# Altium PCB lab2_ignatova_buck_boost.PcbDoc
Units mm, origin at the board's own origin, x right, y up, seen from the top; angles counter-clockwise.
Board outline 45.5 x 25.8 mm, 2 copper layers (Top Layer, Bottom Layer), stack 1.57 mm thick; 22 components, 15 nets, 69 pads, 94 vias.
Unrouted connection lines stored in the file: 98.
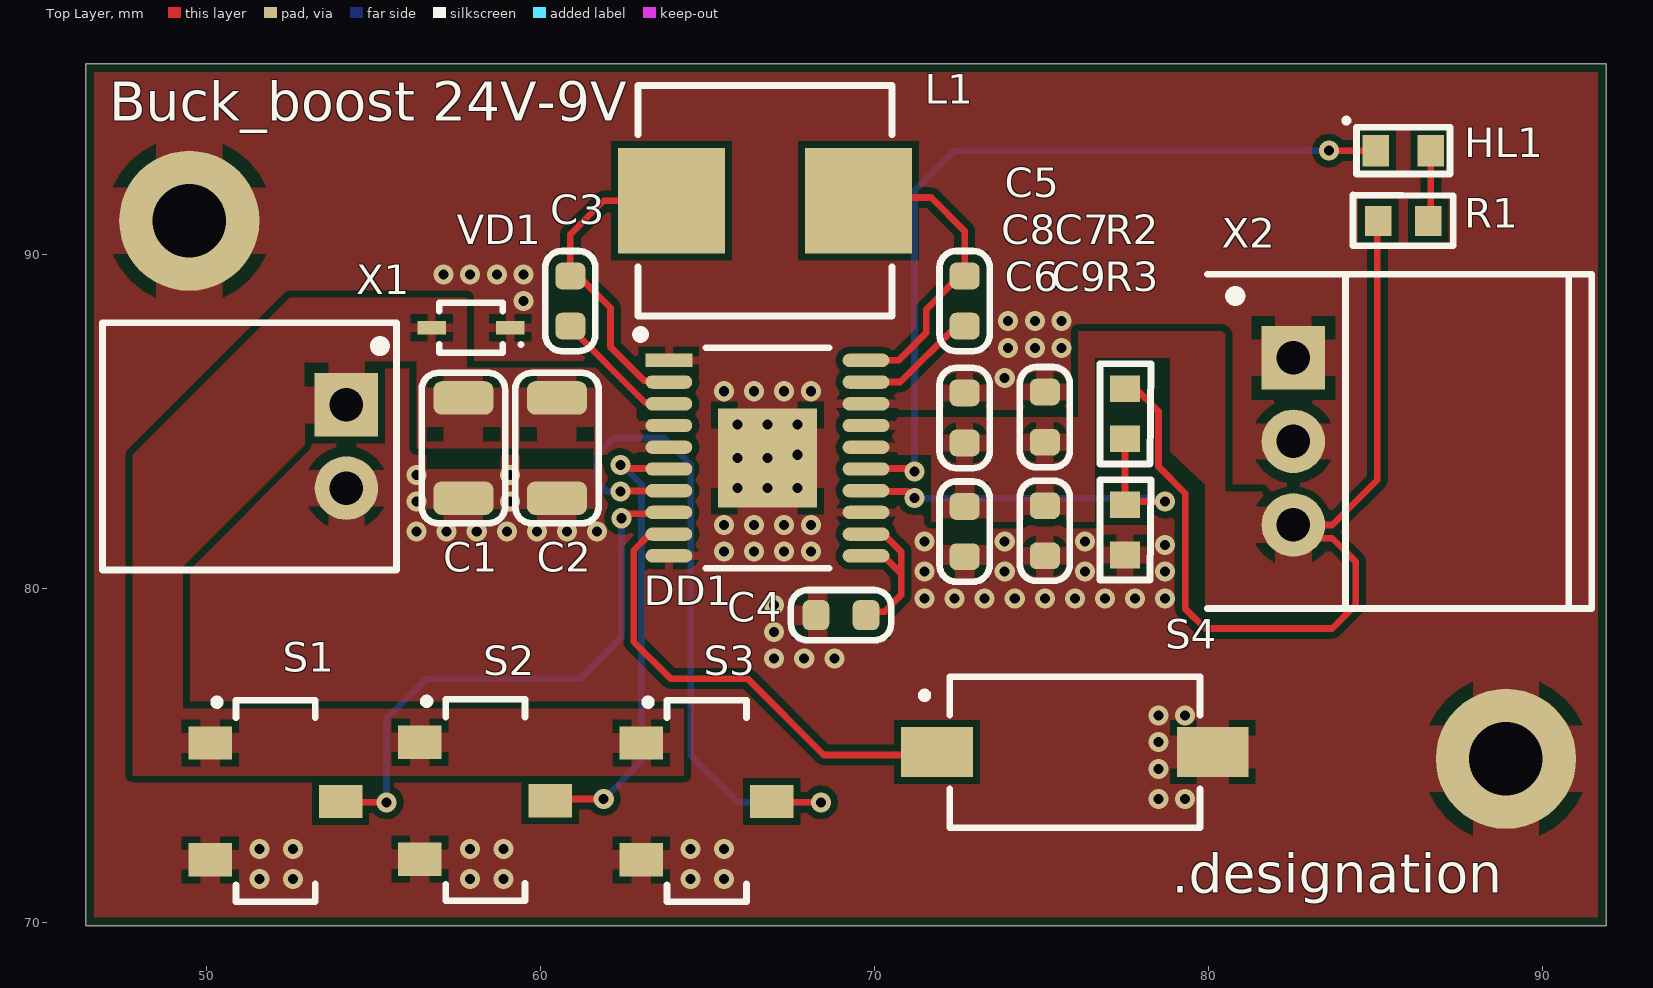
[diagram p0: Top Layer view]
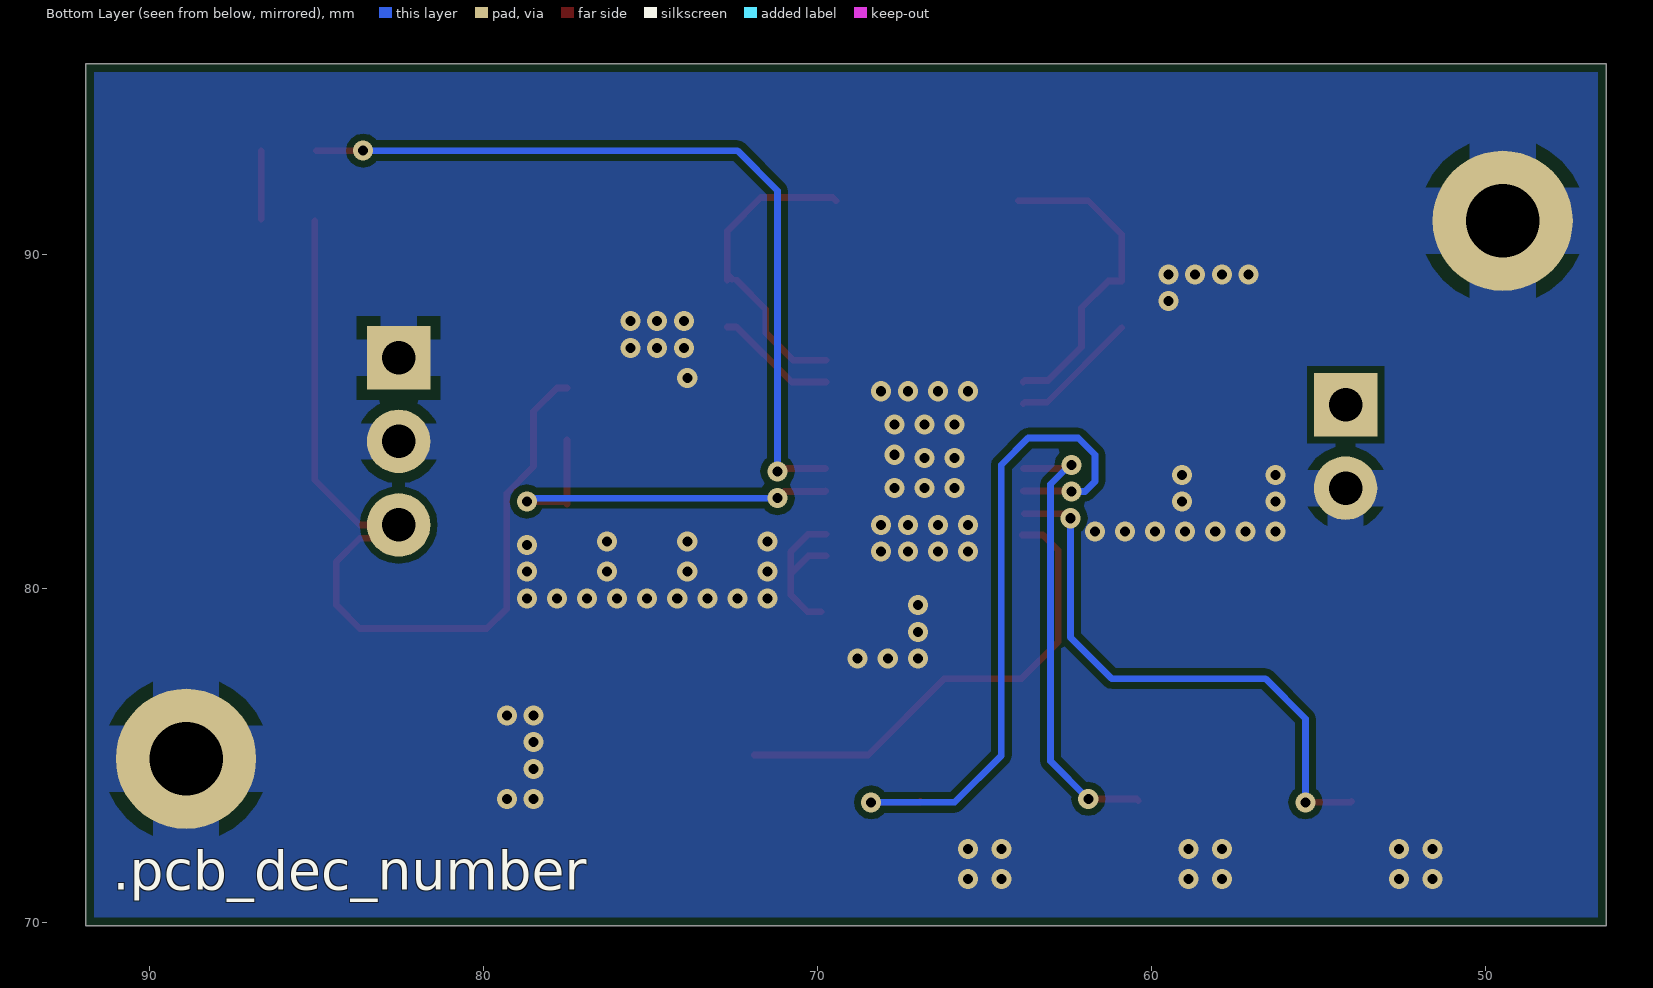
[diagram p1: Bottom Layer view, seen from below]
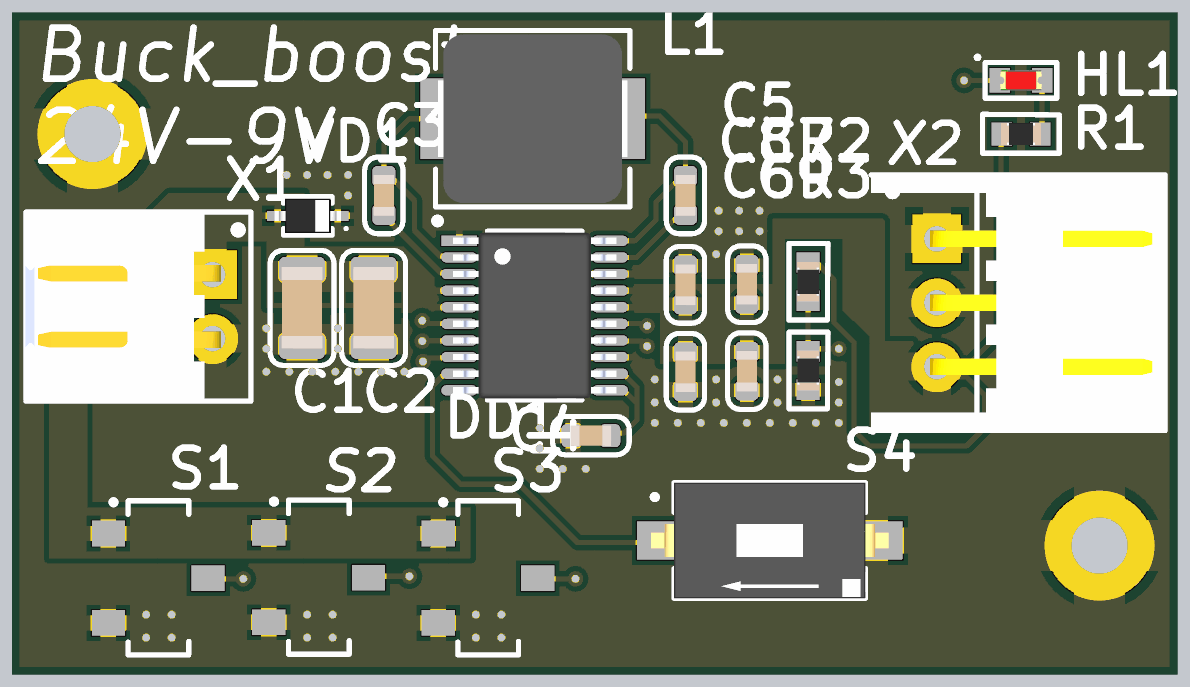
[diagram p2: 3D render of the assembled board from above, using the file's embedded part models]

## Layer stack, top to bottom
Top Solder: solder mask 0.0102, Solder Resist, Dk 3.5
Top Layer: signal copper 0.035
Core 1: core 1.5, FR4, Dk 4.6
Bottom Layer: signal copper 0.035
Bottom Solder: solder mask 0.0102, Solder Resist, Dk 3.5

## Board outline
46.4,69.9 91.9,69.9 91.9,95.7 46.4,95.7

## Design rules (kind name [scope] priority, off if disabled: settings)
AcuteAngle min_acute_angle [OnCopper] p1: minimum=3.50000000000000E+0001 checktracksonly=FALSE // Минимальный угол между примитивами топологии
BoardOutlineClearance board_outline_clearance_std [NOT (OnLayer('Bottom Overlay') OR OnLayer('Top Overlay'))] p1: gap=0.25 ignorepadtopadclearanceinfootprint=FALSE except(0: Arc-SplitContinuation Track-SplitContinuation SMDPad-SplitContinuation THPad-SplitContinuation Via-SplitContinuation Fill-SplitContinuation Poly-SplitContinuation Region-SplitContinuation Text-SplitContinuation) // Отступ элементов топологии от края фрезеруемой печатной платы
Clearance clearance_outer_35um_std [OnTopLayer OR OnBottomLayer] p1: gap=0.2 ignorepadtopadclearanceinfootprint=TRUE except(0.25: Arc-Hole Track-Hole SMDPad-Hole THPad-Hole Via-Hole Fill-Hole Poly-Hole Region-Hole Text-Hole) // Зазоры на внешних слоях
Clearance clearance_inner_35um_std [NOT (OnTopLayer Or OnBottomLayer)] p2: gap=0.2 ignorepadtopadclearanceinfootprint=FALSE except(0.25: Arc-Hole Track-Hole SMDPad-Hole THPad-Hole Via-Hole Fill-Hole Poly-Hole Region-Hole Text-Hole) // Зазоры на внутренних слоях
ComponentClearance [All] p1: gap=0 collisioncheckmode=3 verticalgap=0 showdistances=FALSE
DiffPairsRouting diff_pairs_routing [All] p1: maxlimit=0.127 minlimit=0.127 mostfreqgap=0.127 toplayer_minwidth=0.143 toplayer_maxwidth=0.143 toplayer_prefwidth=0.143 bottomlayer_minwidth=0.143 bottomlayer_maxwidth=0.143 bottomlayer_prefwidth=0.143 impedanceprofiledriven=TRUE impedanceprofileid={FD46899E-B5A2-4EF5-A302-5D2DB6A51F35} maxuncoupledlength=12.7 // Правила трассировки дифференциальных пар
HoleSize min_hole_size_std [IsPad] p1: absolutevalues=TRUE maxlimit=5.9 minlimit=0.6 maxpercent=80.000 minpercent=20.000 // Диаметр межслойного переходного отверстия
HoleSize min_hole_size_via_std [IsVia] p2: absolutevalues=TRUE maxlimit=5.9 minlimit=0.3 maxpercent=80.000 minpercent=20.000 // Минимальный диаметр монтажного отверстия
HoleToHoleClearance hole_to_hole_clearance_std [All] p1: gap=0.2 allowstackedmicrovias=FALSE // Минимальное расстояние между краями двух отверстий
MinimumAnnularRing min_via_ar_std [All] p1: minimumring=0.15 // Поясок площадки переходного отверстия (Annular ring VIA)
MinimumAnnularRing min_pad_ar_std [All] p2: minimumring=0.2 // Поясок монтажной контактной площадки (Annular ring PAD)
MinimumSolderMaskSliver min_solder_mask_bridge_std [All] p1: minsoldermaskwidth=0.15 // Мнимальная ширина масочного мостика
PlaneClearance plane_clearance_35um_std [All] p1: clearance=0.2 // Отступ полигона (для слоя plane) от элементов топологии
PlaneConnect [All] p1: planeconnectstyle=Relief reliefexpansion=0.5 reliefentries=4 reliefconductorwidth=0.2 reliefairgap=0.2
PolygonConnect poly_connect_to_pad<=0.3 [(AsMM(PadXSize_AllLayers)<=0.301) or (AsMM(PadYSize_AllLayers)<=0.301)] p1: thpad.connectstyle=Relief thpad.reliefconductorwidth=0.2 thpad.reliefentries=4 thpad.polygonreliefangle="90 Angle" thpad.airgapwidth=0.2 smdpad.connectstyle=Relief smdpad.reliefconductorwidth=0.2 smdpad.reliefentries=4 smdpad.polygonreliefangle="90 Angle" smdpad.airgapwidth=0.2 via.connectstyle=Direct via.reliefconductorwidth=0.254 via.reliefentries=4 via.polygonreliefangle="90 Angle" via.airgapwidth=0.254 // Правила подключения полигонов для падов от 0,3мм и меньше
PolygonConnect poly_connect_to_pad<=0.4 [(AsMM(PadXSize_AllLayers)<=0.401) or (AsMM(PadYSize_AllLayers)<=0.401)] p2: thpad.connectstyle=Relief thpad.reliefconductorwidth=0.26 thpad.reliefentries=4 thpad.polygonreliefangle="90 Angle" thpad.airgapwidth=0.2 smdpad.connectstyle=Relief smdpad.reliefconductorwidth=0.26 smdpad.reliefentries=4 smdpad.polygonreliefangle="90 Angle" smdpad.airgapwidth=0.2 via.connectstyle=Direct via.reliefconductorwidth=0.254 via.reliefentries=4 via.polygonreliefangle="90 Angle" via.airgapwidth=0.254 // Правила подключения полигонов для падов от 0,4 и меньше
PolygonConnect poly_connect_to_pad<=0.6 [(AsMM(PadXSize_AllLayers)<=0.601) or (AsMM(PadYSize_AllLayers)<=0.601)] p3: thpad.connectstyle=Relief thpad.reliefconductorwidth=0.33 thpad.reliefentries=4 thpad.polygonreliefangle="90 Angle" thpad.airgapwidth=0.2 smdpad.connectstyle=Relief smdpad.reliefconductorwidth=0.33 smdpad.reliefentries=4 smdpad.polygonreliefangle="90 Angle" smdpad.airgapwidth=0.2 via.connectstyle=Direct via.reliefconductorwidth=0.254 via.reliefentries=4 via.polygonreliefangle="90 Angle" via.airgapwidth=0.254 // Правила подключения полигонов для падов от 0,6мм и меньше
PolygonConnect poly_connect_to_pad<=0.7 [(AsMM(PadXSize_AllLayers)<=0.701) or (AsMM(PadYSize_AllLayers)<=0.701)] p4: thpad.connectstyle=Relief thpad.reliefconductorwidth=0.46 thpad.reliefentries=4 thpad.polygonreliefangle="90 Angle" thpad.airgapwidth=0.2 smdpad.connectstyle=Relief smdpad.reliefconductorwidth=0.46 smdpad.reliefentries=4 smdpad.polygonreliefangle="90 Angle" smdpad.airgapwidth=0.2 via.connectstyle=Direct via.reliefconductorwidth=0.254 via.reliefentries=4 via.polygonreliefangle="90 Angle" via.airgapwidth=0.254 // Правила подключения полигонов для падов от 0,7мм и меньше
PolygonConnect poly_connect_to_pad<=0.8 [(AsMM(PadXSize_AllLayers)<=0.8)or(AsMM(PadYSize_AllLayers)<=0.8)] p5: thpad.connectstyle=Relief thpad.reliefconductorwidth=0.53 thpad.reliefentries=4 thpad.polygonreliefangle="90 Angle" thpad.airgapwidth=0.3 smdpad.connectstyle=Relief smdpad.reliefconductorwidth=0.53 smdpad.reliefentries=4 smdpad.polygonreliefangle="90 Angle" smdpad.airgapwidth=0.2 via.connectstyle=Direct via.reliefconductorwidth=0.254 via.reliefentries=4 via.polygonreliefangle="90 Angle" via.airgapwidth=0.254 // Правила подключения полигонов для падов от 0,8мм и меньше
PolygonConnect poly_connect_to_pad<=1 [(AsMM(PadXSize_AllLayers)<=1.01)or(AsMM(PadYSize_AllLayers)<=1.01)] p6: thpad.connectstyle=Relief thpad.reliefconductorwidth=0.6 thpad.reliefentries=4 thpad.polygonreliefangle="90 Angle" thpad.airgapwidth=0.3 smdpad.connectstyle=Relief smdpad.reliefconductorwidth=0.6 smdpad.reliefentries=4 smdpad.polygonreliefangle="90 Angle" smdpad.airgapwidth=0.2 via.connectstyle=Direct via.reliefconductorwidth=0.254 via.reliefentries=4 via.polygonreliefangle="90 Angle" via.airgapwidth=0.254 // Правила подключения полигонов для падов от 1мм и меньше
PolygonConnect poly_connect_to_pad<=1.3 [(AsMM(PadXSize_AllLayers)<=1.31)or(AsMM(PadYSize_AllLayers)<=1.31)] p7: thpad.connectstyle=Relief thpad.reliefconductorwidth=0.66 thpad.reliefentries=4 thpad.polygonreliefangle="90 Angle" thpad.airgapwidth=0.3 smdpad.connectstyle=Relief smdpad.reliefconductorwidth=0.86 smdpad.reliefentries=4 smdpad.polygonreliefangle="90 Angle" smdpad.airgapwidth=0.2 via.connectstyle=Direct via.reliefconductorwidth=0.254 via.reliefentries=4 via.polygonreliefangle="90 Angle" via.airgapwidth=0.254 // Правила подключения полигонов для падов от 1,3мм и меньше
PolygonConnect poly_connect_to_pad<=1.6 [(AsMM(PadXSize_AllLayers)<=1.61)or(AsMM(PadYSize_AllLayers)<=1.61)] p8: thpad.connectstyle=Relief thpad.reliefconductorwidth=0.8 thpad.reliefentries=4 thpad.polygonreliefangle="90 Angle" thpad.airgapwidth=0.3 smdpad.connectstyle=Relief smdpad.reliefconductorwidth=1 smdpad.reliefentries=4 smdpad.polygonreliefangle="90 Angle" smdpad.airgapwidth=0.2 via.connectstyle=Direct via.reliefconductorwidth=0.254 via.reliefentries=4 via.polygonreliefangle="90 Angle" via.airgapwidth=0.254 // Правила подключения полигонов для падов от 1,6мм и меньше
PolygonConnect poly_connect_to_pad<=1.8 [(AsMM(PadXSize_AllLayers)<=1.8)or(AsMM(PadYSize_AllLayers)<=1.8)] p9: thpad.connectstyle=Relief thpad.reliefconductorwidth=1 thpad.reliefentries=4 thpad.polygonreliefangle="90 Angle" thpad.airgapwidth=0.3 smdpad.connectstyle=Relief smdpad.reliefconductorwidth=1.2 smdpad.reliefentries=4 smdpad.polygonreliefangle="90 Angle" smdpad.airgapwidth=0.2 via.connectstyle=Direct via.reliefconductorwidth=0.254 via.reliefentries=4 via.polygonreliefangle="90 Angle" via.airgapwidth=0.254 // Правила подключения полигонов для падов от 1,8мм и меньше
PolygonConnect poly_connect_to_pad<=2 [(AsMM(PadXSize_AllLayers)<=2.01)or(AsMM(PadYSize_AllLayers)<=2.01)] p10: thpad.connectstyle=Relief thpad.reliefconductorwidth=1.1 thpad.reliefentries=4 thpad.polygonreliefangle="90 Angle" thpad.airgapwidth=0.3 smdpad.connectstyle=Relief smdpad.reliefconductorwidth=1.4 smdpad.reliefentries=4 smdpad.polygonreliefangle="90 Angle" smdpad.airgapwidth=0.2 via.connectstyle=Direct via.reliefconductorwidth=0.254 via.reliefentries=4 via.polygonreliefangle="90 Angle" via.airgapwidth=0.254 // Правила подключения полигонов для падов от 2мм и меньше
PolygonConnect poly_connect_to_pad<=2.3 [(AsMM(PadXSize_AllLayers)<=2.31)or(AsMM(PadYSize_AllLayers)<=2.31)] p11: thpad.connectstyle=Relief thpad.reliefconductorwidth=1.2 thpad.reliefentries=4 thpad.polygonreliefangle="90 Angle" thpad.airgapwidth=0.3 smdpad.connectstyle=Relief smdpad.reliefconductorwidth=1.4 smdpad.reliefentries=4 smdpad.polygonreliefangle="90 Angle" smdpad.airgapwidth=0.2 via.connectstyle=Direct via.reliefconductorwidth=0.254 via.reliefentries=4 via.polygonreliefangle="90 Angle" via.airgapwidth=0.254 // Правила подключения полигонов для падов от 2,3мм и меньше
PolygonConnect poly_connect_to_pad<=2.5 [(AsMM(PadXSize_AllLayers)<=2.51)or(AsMM(PadYSize_AllLayers)<=2.51)] p12: thpad.connectstyle=Relief thpad.reliefconductorwidth=1.2 thpad.reliefentries=4 thpad.polygonreliefangle="90 Angle" thpad.airgapwidth=0.3 smdpad.connectstyle=Relief smdpad.reliefconductorwidth=1.4 smdpad.reliefentries=4 smdpad.polygonreliefangle="90 Angle" smdpad.airgapwidth=0.2 via.connectstyle=Direct via.reliefconductorwidth=0.254 via.reliefentries=4 via.polygonreliefangle="90 Angle" via.airgapwidth=0.254 // Правила подключения полигонов для падов от 2,5мм и меньше
PolygonConnect poly_connect_to_pad<=2.7 [(AsMM(PadXSize_AllLayers)<=2.71)or(AsMM(PadYSize_AllLayers)<=2.71)] p13: thpad.connectstyle=Relief thpad.reliefconductorwidth=1.4 thpad.reliefentries=4 thpad.polygonreliefangle="90 Angle" thpad.airgapwidth=0.3 smdpad.connectstyle=Relief smdpad.reliefconductorwidth=1.6 smdpad.reliefentries=4 smdpad.polygonreliefangle="90 Angle" smdpad.airgapwidth=0.2 via.connectstyle=Direct via.reliefconductorwidth=0.254 via.reliefentries=4 via.polygonreliefangle="90 Angle" via.airgapwidth=0.254 // Правила подключения полигонов для падов от 2,7мм и меньше
PolygonConnect poly_connect_to_pad<=3 [(AsMM(PadXSize_AllLayers)<=3.01)or(AsMM(PadYSize_AllLayers)<=3.01)] p14: thpad.connectstyle=Relief thpad.reliefconductorwidth=1.6 thpad.reliefentries=4 thpad.polygonreliefangle="90 Angle" thpad.airgapwidth=0.3 smdpad.connectstyle=Relief smdpad.reliefconductorwidth=1.8 smdpad.reliefentries=4 smdpad.polygonreliefangle="90 Angle" smdpad.airgapwidth=0.2 via.connectstyle=Direct via.reliefconductorwidth=0.254 via.reliefentries=4 via.polygonreliefangle="90 Angle" via.airgapwidth=0.254 // Правила подключения полигонов для падов от 3мм и меньше
PolygonConnect poly_connect_to_pad<=7 [(AsMM(PadXSize_AllLayers)<7.01)or(AsMM(PadYSize_AllLayers)<=7.01)] p15: thpad.connectstyle=Relief thpad.reliefconductorwidth=2 thpad.reliefentries=4 thpad.polygonreliefangle="90 Angle" thpad.airgapwidth=0.4 smdpad.connectstyle=Relief smdpad.reliefconductorwidth=2 smdpad.reliefentries=4 smdpad.polygonreliefangle="90 Angle" smdpad.airgapwidth=0.3 via.connectstyle=Direct via.reliefconductorwidth=0.254 via.reliefentries=4 via.polygonreliefangle="90 Angle" via.airgapwidth=0.254 // Правила подключения полигонов для падов от 7мм и меньше
PolygonConnect poly_connect_to_pad [All] p16: thpad.connectstyle=Relief thpad.reliefconductorwidth=0.25 thpad.reliefentries=4 thpad.polygonreliefangle="90 Angle" thpad.airgapwidth=0.2 smdpad.connectstyle=Relief smdpad.reliefconductorwidth=0.25 smdpad.reliefentries=4 smdpad.polygonreliefangle="90 Angle" smdpad.airgapwidth=0.2 via.connectstyle=Direct via.reliefconductorwidth=0.25 via.reliefentries=4 via.polygonreliefangle="90 Angle" via.airgapwidth=0.2 // Правила подключения полигонов общие
RoutingCorners [All] p1 off: cornerstyle=45-Degree minsetback=2.5 maxsetback=2.5
RoutingVias [All] p1: holewidth=0.3 width=0.6 viastyle="Through Hole" minholewidth=0.3 minwidth=0.6 maxholewidth=5.9 maxwidth=6.4
SilkToSilkClearance silk_to_silk_clearance_std [All] p1 off: silktosilkclearance=0.15 // Отступ текста шелкографии от других примитивов шелкографии
SilkToSolderMaskClearance silk_to_solder_mask_clearance_std [IsPad] p1 off: minsilkscreentomaskgap=0.15 clearancetoexposedcopper=FALSE // Минимальное расстояние между элементами шелкографии и вскрытой медью
SolderMaskExpansion solder_mask_expansion_std [All] p1: expansion=0.05 // Припуск паяльной масски
UnRoutedNet [All] p1: checkbadconnections=TRUE
Width width_35um_std [All] p1: maxlimit=10 minlimit=0.2 preferedwidth=0.2 checkconnectedcopper=TRUE // Ширина проводников (общая)
19 further rules are at their usual default settings.

## Components (designator, comment, footprint, x,y, rotation, side; value= is the part's Value field where it differs from the comment)
C1 "10 мк" C1206 57.7,84.2 r270 top
C2 "10 мк" C1206 60.5,84.2 r270 top
C3 "0,1 мк" C0603 60.9,88.6 r270 top
C4 "4,7 мк" C0603 69,79.2 r180 top
C5 "0,1 мк" C0603 72.7,88.6 r270 top
C6 "0,1 мк" C0603 72.7,81.7 r270 top
C7 "22 мк" C0603 75.1,85.125 r90 top
C8 "22 мк" C0603 72.7,85.1 r90 top
C9 "2,2 мк" C0603 75.1,81.725 r270 top
DD1 "TPS55160QPWPRQ1" HTSSOP-20 66.8,83.9 r0 top
HL1 "TLMG1100-GS08" HL0603 85.825,93.1 r0 top
L1 "SRP7028A-4R7M" SRP-2-730X660X280 66.725,91.6 r0 top
R1 "100 к" R0603 85.825,91 r180 top
R2 "205 к" R0603 77.5,85.225 r90 top
R3 "20 к" R0603 77.5,81.75 r90 top
S1 "TDD01H0SB1R" TDD01H0SB1R 52.1,73.6 r0 top
S2 "TDD01H0SB1R" TDD01H0SB1R 58.375,73.626 r0 top
S3 "TDD01H0SB1R" TDD01H0SB1R 65,73.6 r0 top
S4 "SDA01H1SBD" SDA01H1SBD 76,75.1 r0 top
VD1 "SD24C-01FTG" SOD-323 57.925,87.8 r180 top
X1 "DS1029-2-MRW6XB" DS1029-2-MRW6XB 51.05,84.25 r270 top
X2 "DS1069-3MRW6XA" DS1069-3MRW6XA 85.7,84.4 r270 top

## Footprints (in the part's own frame and the unit in brackets; to place one, negate y for a bottom-side part, rotate by r counter-clockwise, add the part's x,y. Pads: shape width x height; smd on the part's side, far side on the other; paste and mask are expansions set on the pad)
C0603 [mm] "Chip Capacitor, 2-Leads, Body 1,60x0,80mm, IPC Medium Density"
  rrect50% 0.8x0.9 smd: 1(-0.75,0) 2(0.75,0)
  silkscreen extent -1.5,-0.75 1.5,0.75, body extent -0.8,-0.4 0.8,0.4, height 0.8
C1206 [mm] "Chip Capacitor, 2-Leads, Body 3,20x1,60mm, IPC Medium Density"
  rrect50% 1x1.8 smd: 1(-1.5,0) 2(1.5,0)
  silkscreen extent -2.25,-1.25 2.25,1.25, body extent -1.6,-0.8 1.6,0.8, height 0.78
DS1029-2-MRW6XB [mm]
  rect 1.9x1.9 hole 1: 1(-1.25,3.15)
  round 1.9 hole 1: 2(1.25,3.15)
  silkscreen extent -3.7,-4.15 3.7,4.65, body extent -3.7,-4.17 3.7,3.47, height 5.75
DS1069-3MRW6XA [mm]
  rect 1.9x1.9 hole 1: 1(-2.5,-3.164)
  round 1.9 hole 1: 2(0,-3.164) 3(2.5,-3.164)
  silkscreen extent -5,-5.74 5,5.76, body extent -5,-5.74 5,5.76, height 5.85
HL0603 [mm] "Chip Diode, 2-Leads, Body 1,60x0,80mm, IPC Medium Density"
  rect 0.8x0.95 smd: 1(-0.825,0) 2(0.825,0)
  silkscreen extent -1.75,-0.7 1.4,0.95, body extent -0.81,-0.4 0.81,0.4, height 0.6
HTSSOP-20 [mm] "TSOP, 20-Leads, Body 6,50x4,40mm, Pitch 0,65mm, Thermal Pad 2,96x2,96mm, IPC Medium Density"
  rect 2.96x2.96 smd: 0(0,0)
  rect 1.4x0.4 smd: 1(-2.95,2.925)
  oval 1.4x0.4 smd: 2(-2.95,2.275) 3(-2.95,1.625) 4(-2.95,0.975) 5(-2.95,0.325) 6(-2.95,-0.325) 7(-2.95,-0.975) 8(-2.95,-1.625) 9(-2.95,-2.275) 10(-2.95,-2.925) 11(2.95,-2.925) 12(2.95,-2.275) 13(2.95,-1.625) 14(2.95,-0.975) 15(2.95,-0.325) 16(2.95,0.325) 17(2.95,0.975) 18(2.95,1.625) 19(2.95,2.275) 20(2.95,2.925)
  silkscreen extent -3.92,-3.3 1.85,3.82, body extent -3.2,-3.25 3.2,3.25, height 1.1
R0603 [mm] "Chip Resistor, 2-Leads, Body 1,60x0,80mm, IPC Medium Density"
  rect 0.8x0.9 smd: 1(-0.75,0) 2(0.75,0)
  silkscreen extent -1.5,-0.77 1.5,0.75, body extent -0.77,-0.43 0.78,0.43, height 0.43
SDA01H1SBD [mm]
  rect 2.15x1.5 smd: 1(-4.125,0) 2(4.125,0)
  silkscreen extent -4.6,-2.26 3.74,2.26, body extent -4.65,-2.26 4.65,2.26, height 5.44
SOD-323 [mm] "SODFL, 2-Leads, Body 1,30x2,57mm, IPC Medium Density"
  rect 0.85x0.4 smd: 1(-1.175,0) 2(1.175,0)
  silkscreen extent -1.55,-0.75 0.95,0.75, body extent -1.3,-0.67 1.3,0.68, height 1.1
SRP-2-730X660X280 [mm] "Precision Wire Wound Inductor, 2-Leads, Body 7,30x6,60mm, IPC Medium Density"
  rect 3.2x3.15 smd: 1(-2.8,0) 2(2.8,0)
  silkscreen extent -3.8,-3.45 3.8,3.45, body extent -3.7,-3.3 3.7,3.3, height 3
TDD01H0SB1R [mm]
  rect 1.3x1 smd: 1(-1.975,1.774) 2(-1.975,-1.726) 3(1.925,0.024)
  silkscreen extent -1.87,-2.98 1.17,3.09, body extent -2.12,-2.98 2.08,3.02, height 2.29

## Part data
C1 C2: library part c0094, "=Описание", HelpURL=https://www.yageo.com/upload/media/product/productsearch/datasheet/mlcc/UPY-GPHC_X5R_4V-to-50V_26.pdf, ID=c0094, Корпус=1206, Наименование=CC1206KKX5R9BB106, Напряжение="50 В", Номинал="10 мк", Номинальное напряжение="50 В", Описание="Конденсатор чип 1206 10 мкФ 50 В ±10 %", Отклонение="±10 %", Производитель="YAGEO Corp.", Рабочие температуры="от –55 °С до +85 °С", Температурный коэффициент емкости=X5R, Фамилия=Самарин
C3 C5 C6: library part c0036, "=Описание", HelpURL=https://www.yageo.com/upload/media/product/products/datasheet/mlcc/UPY-GPHC_X7R_6.3V-to-50V_20.pdf, ID=c0036, Корпус=0603, Наименование=CC0603JRX7R9BB104, Напряжение="50 В", Номинал="0,1 мк", Номинальное напряжение="50 В", Описание="Конденсатор чип 0603 100 нФ 50 В ±5 %", Отклонение="±5 %", Производитель="YAGEO Corp.", Рабочие температуры="от –55 °С до +125 °С", Температурный коэффициент емкости=X7R, Фамилия=Ларионов
C4: library part c0082, "=Описание", HelpURL=https://www.yageo.com/upload/media/product/productsearch/datasheet/mlcc/UPY-GPHC_X5R_4V-to-50V_26.pdf, ID=c0082, Корпус=0603, Наименование=CC0603KRX5R8BB475, Напряжение="25 В", Номинал="4,7 мк", Номинальное напряжение="25 В", Описание="Конденсатор чип 0603 4,7 мкФ 25 В ±10 %", Отклонение="±10 %", Производитель="YAGEO Corp.", Рабочие температуры="от –55 °С до +85 °С", Температурный коэффициент емкости=X5R, Фамилия=Ларионов
C7 C8: library part c0101, "=Описание", HelpURL=https://www.yageo.com/upload/media/product/productsearch/datasheet/mlcc/UPY-GPHC_X5R_4V-to-50V_26.pdf, ID=c0101, Корпус=0603, Наименование=CC0603MPX5R6BB226, Напряжение="10 В", Номинал="22 мк", Номинальное напряжение="10 В", Описание="Конденсатор чип 0603 22 мкФ 10 В ±20 %", Отклонение="±20 %", Производитель="YAGEO Corp.", Рабочие температуры="от –55 °С до +85 °С", Температурный коэффициент емкости=X5R, Фамилия=Чернов
C9: library part c0025, "=Описание", HelpURL=https://www.yageo.com/upload/media/product/productsearch/datasheet/mlcc/UPY-GPHC_X7R_6.3V-to-50V_20.pdf, ID=c0025, Корпус=0603, Наименование=CC0603KRX7R6BB225, Напряжение="10 В", Номинал="2,2 мк", Номинальное напряжение="10 В", Описание="Конденсатор чип 0603 2,2 мкФ 10 В ±10 %", Отклонение="±10 %", Производитель="YAGEO Corp.", Рабочие температуры="от -55 °С до +125 °С", Фамилия=Чернов
DD1: library part dd0012, "=Описание", HelpURL=https://www.ti.com/product/TPS55160-Q1, ID=dd0012, Входное напряжение="от 3,6 В до 36 В", Выходное напряжение="от 5,7 В до 9 В", Коммутируемый ток="до 1 А", Корпус=HTSSOP-20, Наименование=TPS55160QPWPRQ1, Описание="Повышающий/понижающий преобразователь напряжения 36 В и 1 А", Производитель="Texas Instruments", Рабочие температуры="от –40 °С до +125 °С", Фамилия=Игнатова, Частота переключения="2 МГц"
HL1: library part hl0005, "=Описание", HelpURL=https://www.vishay.com/leds/list/product-83173/, ID=hl0005, Корпус=0603, Наименование=TLMG1100-GS08, Номинальная длина волны="570 нм", Номинальная сила света="35 мкд", Номинальное падение напряжения="2,1 В", Номинальный прямой ток="30 мА", Описание="Светодиод чип 0603 зеленый", Производитель="Vishay Intertechnology, Inc.", Рабочие температуры="от -40 °С до +100 °С", Рассеиваемая мощность="90 мВт", Фамилия=Ларионов, Цвет=Green
L1: library part l0003, "=Описание", HelpURL=https://www.bourns.com/products/magnetic-products/power-inductors-aec-q200-compliant/product/SRP7028A, ID=l0003, Индуктивность="4,7 мкГн", Корпус="7,3 x 6,6 x 2,8", Максимальное активное сопротивление="40 мОм", Наименование=SRP7028A-4R7M, Номинал="4,7 мкГн", Номинальное активное сопротивление="37 мОм", Номинальный ток (при нагреве на 20 °С/40 °С)="5,5 А", Описание="Катушка индуктивности 4,7 мкГн ±20 %", Отклонение="±20 %", Производитель="Bourns, Inc.", Рабочее напряжение="не указано", Рабочие температуры="от –55 °С до +150 °С", Резонансная частота="21 МГц", Ток насыщения="10 А", Фамилия=Игнатова
R1: library part r0028, "=Описание", HelpURL=https://www.yageo.com/upload/media/product/productsearch/datasheet/rchip/PYu-RC_Group_51_RoHS_L_11.pdf, ID=r0028, Корпус=0603, Наименование=RC0603FR-07100KL, Номинал="100 к", Номинальное напряжение="75 В", Номинальный ток="1 А", Описание="Резистор чип 0603 100 кОм ±1 % 0,1 Вт", Отклонение="±1 %", Производитель="YAGEO Corp.", Рабочие температуры="от -55 °С до +155 °С", Фамилия=Водорезов
R2: library part r0083, "=Описание", ID=r0083, Корпус=0603, Наименование=RC0603FR-07205KL, Номинал="205 к", Номинальное напряжение="75 В", Номинальный ток="1 А", Описание="Резистор чип 0603 205 кОм ±1 % 0,1 Вт", Отклонение="±1 %", Производитель="YAGEO Corp.", Рабочие температуры="от -55 °С до +155 °С", Фамилия=Игнатова
R3: library part r0022, "=Описание", HelpURL=https://www.yageo.com/upload/media/product/productsearch/datasheet/rchip/PYu-RC_Group_51_RoHS_L_11.pdf, ID=r0022, Корпус=0603, Наименование=RC0603FR-0720KL, Номинал="20 к", Номинальное напряжение="75 В", Номинальный ток="1 А", Описание="Резистор чип 0603 20 кОм ±1 % 0,1 Вт", Отклонение="±1 %", Производитель="YAGEO Corp.", Рабочие температуры="от -55 °С до +155 °С", Фамилия=Паньков
S1 S2 S3: library part s0005, "=Описание", HelpURL=https://www.ckswitches.com/products/switches/product-details/DIP/TDD/TDD01H0SB1R/, ID=s0005, Количество контактов=3, Корпус=6,00х4,20х2,30, Наименование=TDD01H0SB1R, Описание="2-х позиционный движковый переключатель", Производитель=C&K, Промывка=Разрешена, Рабочие температуры="от –35 °С до +85 °С", Сопротивление контакта="100 мОм", Ток нагрузки="25 мА @ 24 В", Фамилия=Игнатова
S4: library part s0002, "=Описание", HelpURL=https://www.ckswitches.com/products/switches/product-details/DIP/SDA/SDA01H1SBD/, ID=s0002, Количество контактов=2, Корпус=4,52х9,30х5,45, Наименование=SDA01H1SBD, Описание="2-х позиционный движковый переключатель", Производитель=C&K, Промывка=Разрешена, Рабочие температуры="от –40 °С до +85 °С", Сопротивление контакта="50 мОм", Ток нагрузки="100 мА @ 5 В", Фамилия=Паньков
VD1: library part vd0005, "=Описание", HelpURL=https://www.littelfuse.com/products/tvs-diode-arrays/general-purpose-esd-protection/sdc/sd24c_01ftg.aspx, ID=vd0005, Корпус=SOD-323, Наименование=SD24C-01FTG, Описание="Двунаправленная диодная сборка для подавления помех, 24 В", Производитель="Littelfuse, Inc.", Фамилия=Игнатова
X1: library part x0006, "=Описание", Contact_1=VIN, Contact_2=GND, HelpURL=http://www.connfly.com/productshow.aspx?id=352, ID=x0006, Наименование=DS1029-2-MRW6XB, Описание="CWF 2 pin Type B 2,5 мм вилка угловой", Производитель="Connfly Electronic Co. LTD.", Фамилия=Ларионов
X2: library part x0019, "=Описание", Contact_1=VOUT, Contact_2=GND, Contact_3=GND, HelpURL=http://en.connfly.group/product/xVkr=EusQssAN0gN=Aos=mU+UrVkR9kqEAN0gN0MUR+g+NB+A, ID=x0019, Наименование=DS1069-3MRW6XA, Описание="CWF 3 pin Type A 2,5 мм вилка угловой", Производитель="Connfly Electronic Co., Ltd.", Фамилия=Паньков

## Free pads (board coordinates)
  round 4.2 hole 2.2: 2(49.5,91) 2(88.9,74.9)

## Via types
v1: diameter 0.6, hole 0.3, Top Layer to Bottom Layer, tented both sides, 94 vias

## Nets (pads, with @x,y where several pads share a name; then routed paths per layer and width w, separated by ;. In a path a pad name is that pad's centre, name@x,y a point inside that pad or via, vN(x,y) a via of type N, cw(c..) or ccw(c..) an arc to the next point about the centre after c; other vN are vias at no path point)
+9V: C6.1 C7.1 C8.1 C9.1 DD1.16 DD1.17 R1.2 R2.2 X2.3 | length 27.7
  Top Layer w0.2: R2.2@77.5,86 77.8,86 78.5,85.3 78.5,83.649 79.3,82.849 79.3,79.4 79.9,78.8 83.7,78.8 84.4,79.5 84.4,80.8 83.7,81.5 82.9,81.5 82.5,81.9 83.7,81.9 85.05,83.25 R1.2@85.05,91
+24V: C1.1 C2.1 DD1.4 DD1.5 S1.1 S2.1 S3.1 VD1.2 X1.1
GND: C1.2 C2.2 C4.2 C6.2 C7.2 C8.2 C9.2 DD1.0 DD1.1 DD1.10 DD1.13 DD1.18 pad.2 R3.1 S1.2 S2.2 S3.2 S4.2 VD1.1 X1.2 X2.1 X2.2
  other v1: 51.6,71.3 52.6,71.3 57.9,71.3 58.9,71.3 64.5,71.3 65.5,71.3 51.6,72.2 52.6,72.2 57.9,72.2 58.9,72.2 64.5,72.2 65.5,72.2 78.5,73.7 79.3,73.7 78.5,74.6 78.5,75.4 78.5,76.2 79.3,76.2 67,77.9 67.9,77.9 68.8,77.9 67,78.7 67,79.5 71.5,79.7 72.4,79.7 73.3,79.7 74.2,79.7 75.1,79.7 76,79.7 76.9,79.7 77.8,79.7 78.7,79.7 71.5,80.5 73.9,80.5 76.3,80.5 78.7,80.5 65.5,81.1 66.4,81.1 67.3,81.1 68.1,81.1 78.7,81.3 71.5,81.4 73.9,81.4 76.3,81.4 56.3,81.7 57.2,81.7 58.1,81.7 59,81.7 59.9,81.7 60.8,81.7 61.7,81.7 65.5,81.9 66.4,81.9 67.3,81.9 68.1,81.9 56.3,82.6 59.1,82.6 65.9,83 66.8,83 67.7,83 56.3,83.4 59.1,83.4 65.9,83.9 66.8,83.9 67.7,84 65.9,84.9 66.8,84.9 67.7,84.9 65.5,85.9 66.4,85.9 67.3,85.9 68.1,85.9 73.9,86.3 74,87.2 74.8,87.2 75.6,87.2 74,88 74.8,88 75.6,88 59.5,88.6 57.1,89.4 57.9,89.4 58.7,89.4 59.5,89.4
IGN: DD1.6 S2.3 | length 13.8
  Top Layer w0.2: S2.3@60.4,73.65 60.45,73.7 v1(61.9,73.7) ; v1(62.4,83.7) 62.512,83.588 DD1.6@63.837,83.588
  Bottom Layer w0.2: v1(61.9,73.7) 63.031,74.831 63.031,83.117 62.449,83.7 v1(62.4,83.7)
IGN_PWRL: DD1.8 S1.3 | length 17.2
  Top Layer w0.2: S1.3 54.049,73.6 v1(55.4,73.6) ; v1(62.431,82.1) 62.431,82.244 62.375,82.3 62.438,82.238 DD1.8@63.813,82.238
  Bottom Layer w0.2: v1(55.4,73.6) 55.4,76.1 56.6,77.3 61.2,77.3 62.431,78.531 v1(62.431,82.1)
NetC3_1: C3.1 DD1.2 L1.1 | length 9.8
  Top Layer w0.2: DD1.2 63.802,86.223 63.103,86.223 62.1,87.226 62.1,88.4 61.3,89.2 60.9,89.2 60.9,89.3 60.9,90.6 61.9,91.6 L1.1@64,91.6
NetC3_2: C3.2 DD1.3 | length 3.9
  Top Layer w0.2: C3.2@60.9,87.8 63.127,85.573 63.802,85.573 DD1.3
NetC4_1: C4.1 DD1.11 DD1.12 | length 4.9
  Top Layer w0.2: DD1.11 70.275,80.975 70.8,80.45 ; DD1.12 70.275,81.625 70.8,81.1 70.8,80.45 ; C4.1@69.9,79.3 70.3,79.3 70.8,79.8 70.8,80.45
NetC5_1: C5.1 DD1.20 L1.2 | length 9.5
  Top Layer w0.2: L1.2@69.45,91.6 69.55,91.7 71.7,91.7 72.7,90.7 C5.1@72.7,89.225 ; DD1.20 70.725,86.825 71.554,87.654 71.554,88.354 C5.1@72.425,89.225 ; C5.1@72.55,89.25 C5.1@72.7,89.4
NetC5_2: C5.2 DD1.19 | length 3.6
  Top Layer w0.2: DD1.19 70.775,86.175 72.425,87.825 C5.2@72.7,87.825
NetDD1_9: DD1.9 S4.1 | length 14.5
  Top Layer w0.2: DD1.9@63.875,81.6 63.258,81.6 62.8,81.142 62.8,78.4 63.9,77.3 66.2,77.3 68.486,75.014 S4.1@71.9,75.014
NetDD1_14: DD1.14 R2.1 R3.2 | length 12.2
  Top Layer w0.2: DD1.14@69.763,82.913 69.775,82.9 71,82.9 v1(71.2,82.7) ; R3.2@77.5,82.525 R3.2@77.5,82.6 ; R2.1@77.5,84.45 R3.2@77.5,82.6 ; v1(78.7,82.6) R3.2@77.5,82.6
  Bottom Layer w0.2: v1(71.2,82.7) 78.6,82.7 v1(78.7,82.6)
NetDD1_15: DD1.15 HL1.1 | length 24.2
  Top Layer w0.2: DD1.15@69.763,83.588 71.112,83.588 v1(71.2,83.5) ; v1(83.6,93.1) HL1.1
  Bottom Layer w0.2: v1(71.2,83.5) 71.2,91.9 72.4,93.1 v1(83.6,93.1)
NetHL1_2: HL1.2 R1.1 | length 2.1
  Top Layer w0.2: R1.1@86.65,91.05 HL1.2
PS: DD1.7 S3.3 | length 21.1
  Top Layer w0.2: v1(62.4,82.9) 62.413,82.913 DD1.7@63.838,82.913 ; S3.3 66.949,73.6 v1(68.4,73.6)
  Bottom Layer w0.2: v1(62.4,82.9) 62,82.9 61.7,83.2 61.7,84 62.2,84.5 63.7,84.5 64.5,83.7 64.5,75 65.9,73.6 v1(68.4,73.6)

## Polygon pours and split planes (outlines as drawn)
GND on Top Layer "Top Layer-GND" (solid, pour order 126): 46.355,95.655 46.355,69.855 91.855,69.855 91.855,95.655
+9V on Top Layer "Top Layer-+9V" (solid, pour order 124): 78.85,84.083 79.9,83.1 79.9,79.5 84.4,79.5 84.4,82.9 80.5,82.9 80.5,84.6 80.5,85.592 80.5,87.7 76.1,87.7 76.1,85.125 69,85.125 69,84 71.7,84 71.7,82 76.6,82 76.6,86.9 78.85,86.9
+24V on Top Layer "Top Layer-+24V" (solid, pour order 120): 47.8,74.4 64.3,74.4 64.3,76.4 49.3,76.4 49.3,80.65 52.95,84.3 54.7,84.3 54.7,86.8 56.3,86.8 56.3,84.2 61.6,84.2 61.6,84 64.6,84 64.6,85.1 62.873,85.1 62.873,85.394 61.9,86.367 61.9,86.6 57.8,86.6 57.8,88.7 52.5,88.7 47.8,84
no net on Top Layer "Top Layer-No Net 3" (solid, pour order 62): 55.8,95.4
no net on Top Layer "Top Layer-No Net" (solid, pour order 30): 69.7,78.2
no net on Top Layer "Top Layer-No Net 1" (solid, pour order 12): 76,85.125
no net on Top Layer "Top Layer-No Net 2" (solid, pour order 2): 64.1,84.6
GND on Bottom Layer "Bottom Layer-GND" (solid, pour order 102): 46.4,95.7 91.9,95.7 91.9,69.9 46.4,69.9

## Silkscreen, mask and mechanical layers (free items; w line width, h text height)
Top Overlay:
  text "Buck_boost 24V-9V" at 47.1,93.6 h2
  text ".designation" at 78.9,70.5 h2
Bottom Overlay:
  text ".pcb_dec_number" at 91.1,70.6 h2
Board:
  the board outline again, w0.1
Assembly Notes (Mech5):
  text "'.title'" at 46.5,67.5 h2
  text "'.project'_'.pcb_dec_number'['.Pcb_File_Name_No_Path']" at 46.4,65.2 h2